# Altium PCB PCB1.PcbDoc
Units mm, origin at the board's own origin, x right, y up, seen from the top; angles counter-clockwise.
Board outline 100 x 50 mm, 2 copper layers (Top Layer, Bottom Layer); 30 components, 21 nets, 93 pads, 0 vias.
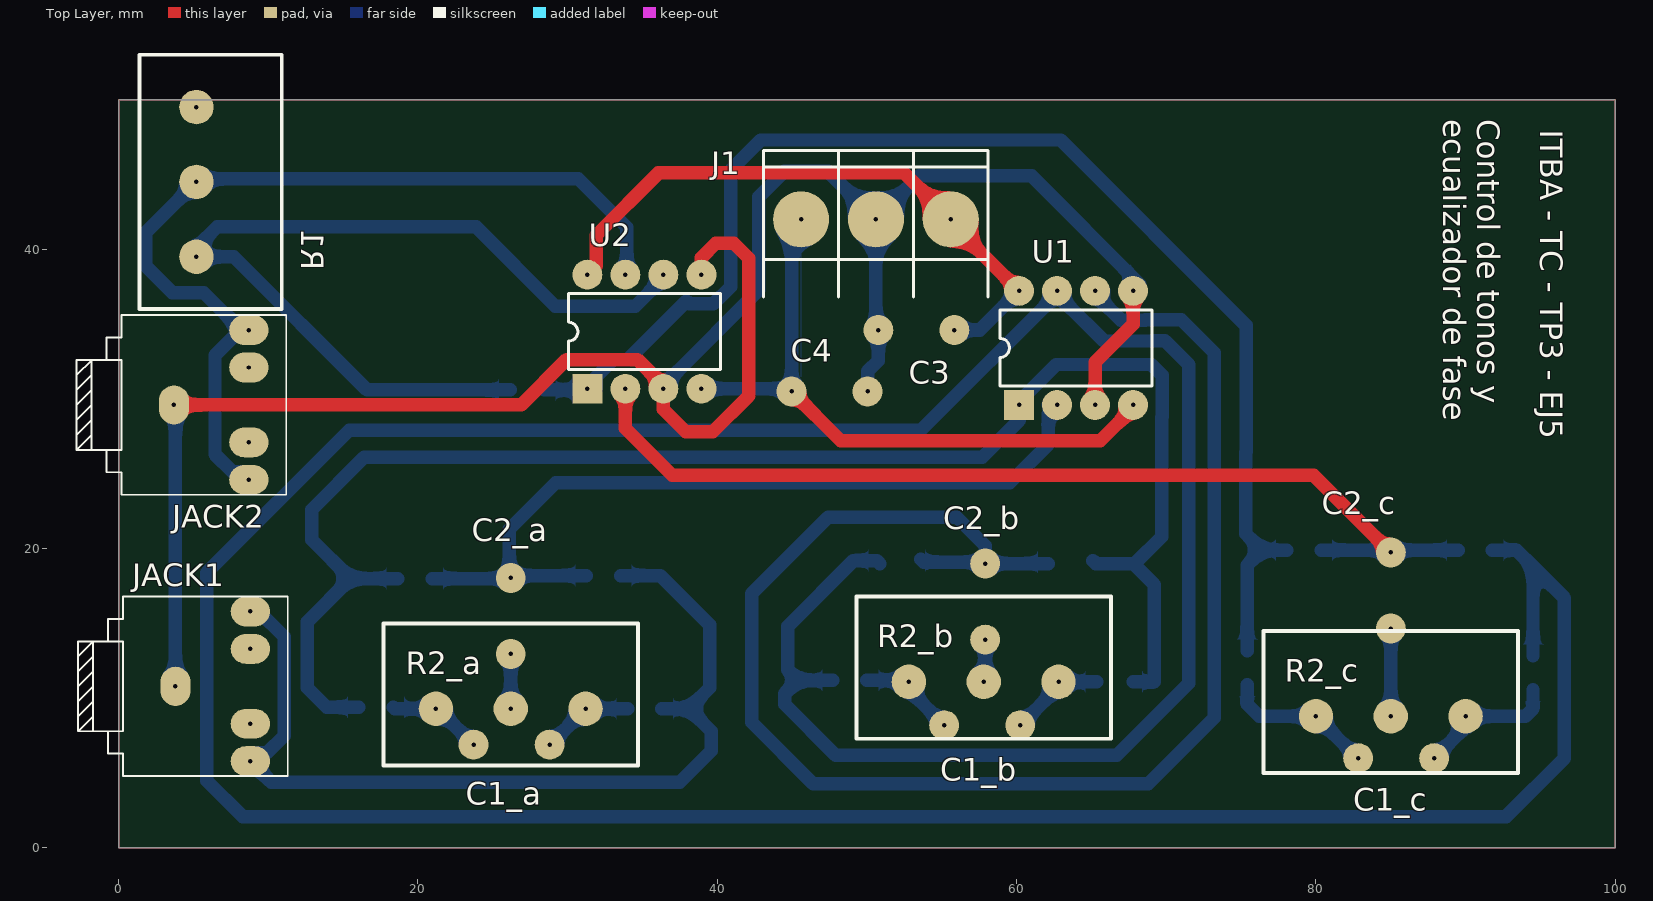
[diagram p0: Top Layer view]
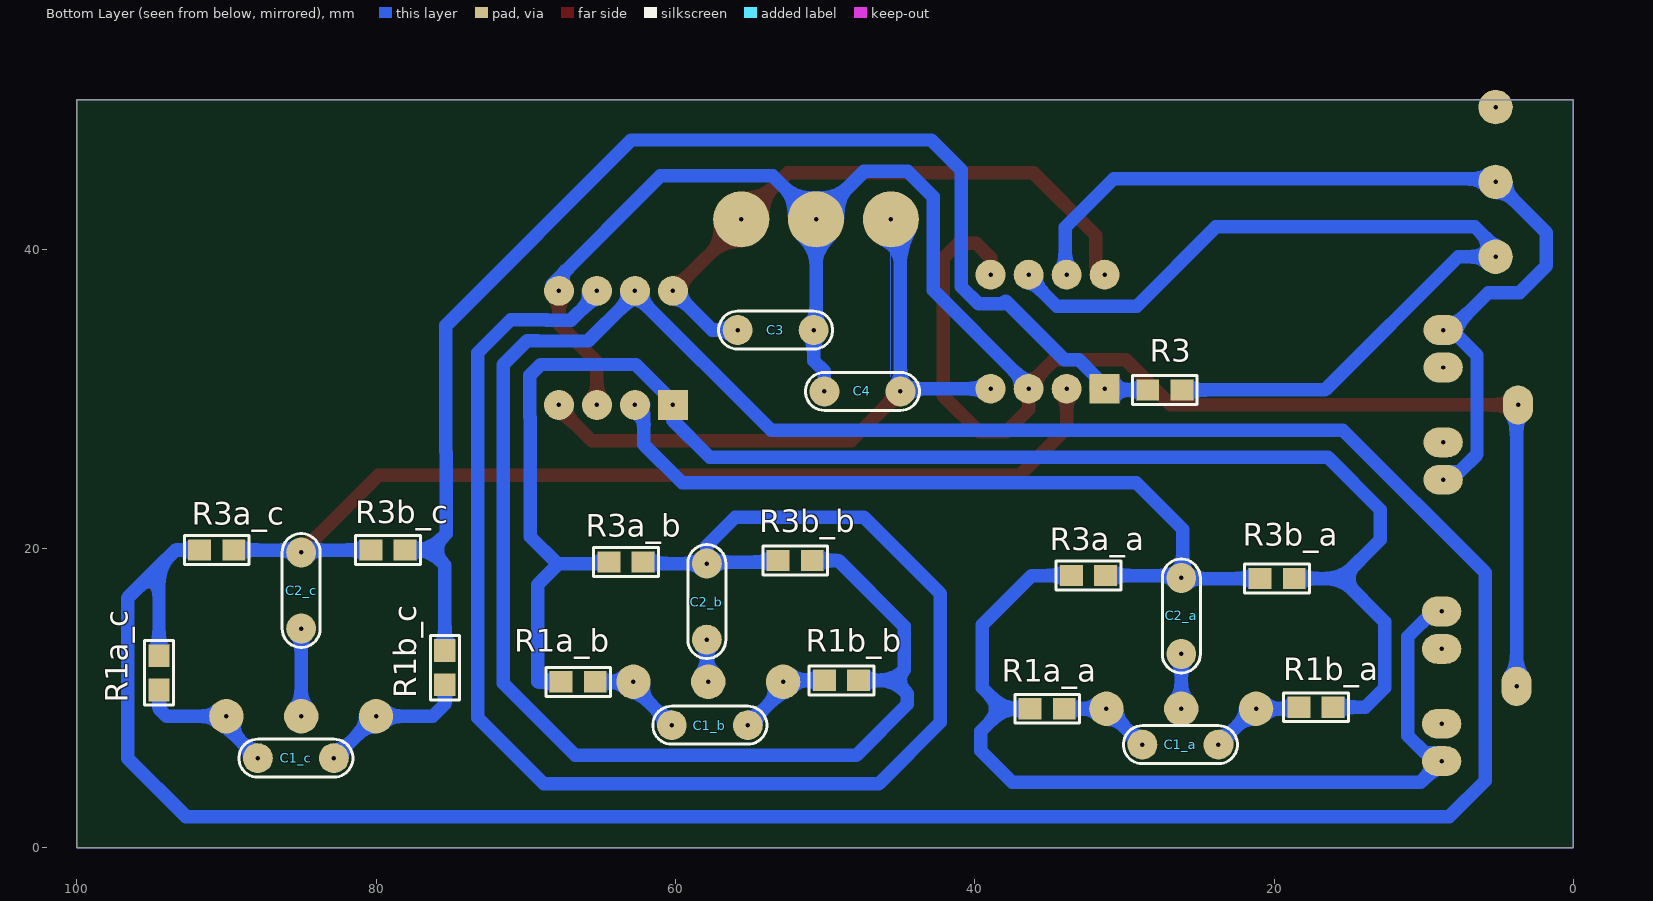
[diagram p1: Bottom Layer view, seen from below]
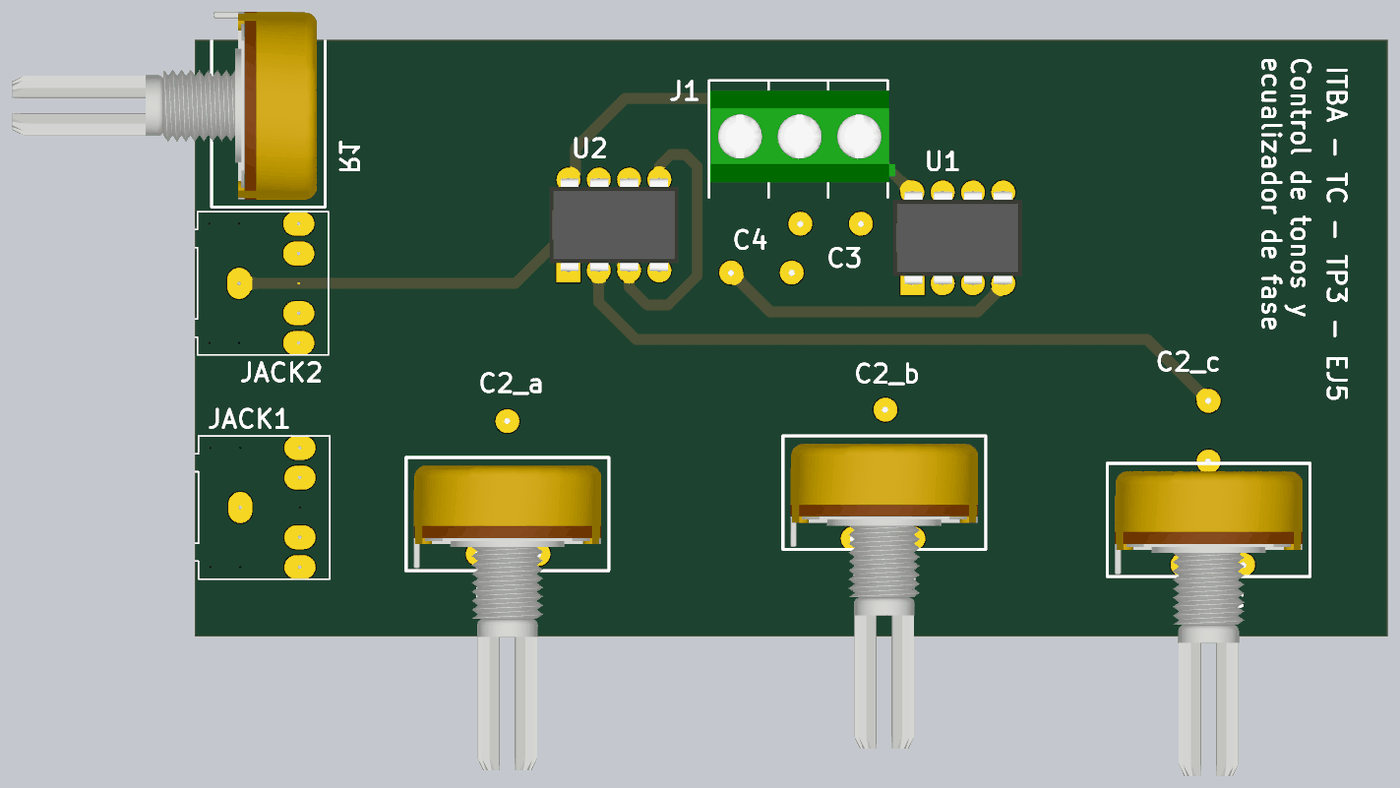
[diagram p2: 3D render of the assembled board from above, using the file's embedded part models]
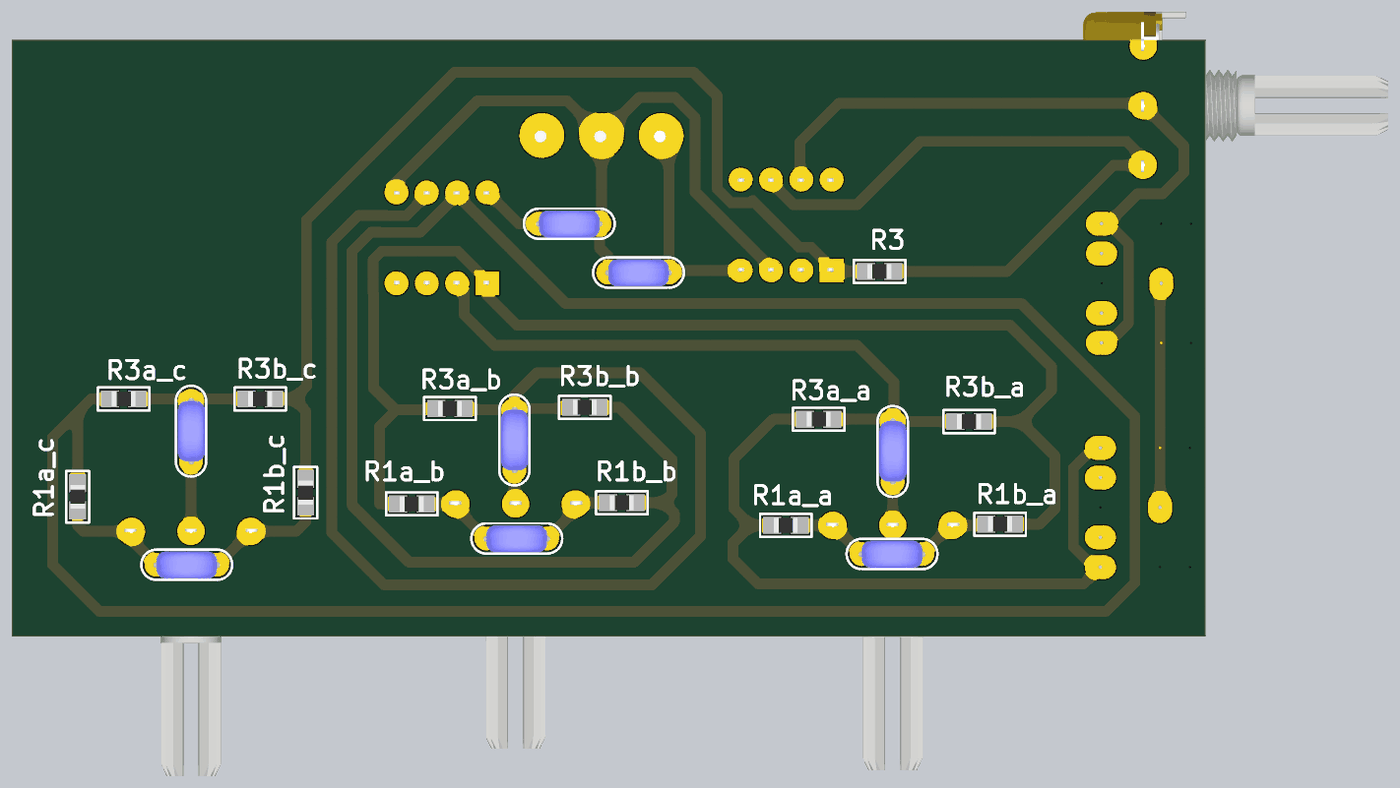
[diagram p3: 3D render of the assembled board from below, using the file's embedded part models]

## Layer stack, top to bottom
Top Solder: solder mask 0.0102, Solder Resist, Dk 3.5
Top Layer: signal copper 0.0356
Dielectric 1: dielectric 0.32, FR-4, Dk 4.8
Bottom Layer: signal copper 0.0356
Bottom Solder: solder mask 0.0102, Solder Resist, Dk 3.5

## Board outline
0,0 100,0 100,50 0,50

## Design rules (kind name [scope] priority, off if disabled: settings)
Clearance [All] p1: gap=0.5 ignorepadtopadclearanceinfootprint=FALSE
PolygonConnect PolygonConnect_5 [All vs IsNamedPolygon('GND_L02_P010')] p1: thpad.connectstyle=Relief thpad.reliefconductorwidth=0.5 thpad.reliefentries=4 thpad.polygonreliefangle="45 Angle" thpad.airgapwidth=0.254 smdpad.connectstyle=Relief smdpad.reliefconductorwidth=0.5 smdpad.reliefentries=4 smdpad.polygonreliefangle="45 Angle" smdpad.airgapwidth=0.254 via.connectstyle=Relief via.reliefconductorwidth=0.254 via.reliefentries=4 via.polygonreliefangle="90 Angle" via.airgapwidth=0.254
PolygonConnect Cond_width_mine [All vs IsNamedPolygon('GND_L02_P010')] p2: thpad.connectstyle=Relief thpad.reliefconductorwidth=0.5 thpad.reliefentries=4 thpad.polygonreliefangle="90 Angle" thpad.airgapwidth=0.254 smdpad.connectstyle=Relief smdpad.reliefconductorwidth=0.5 smdpad.reliefentries=4 smdpad.polygonreliefangle="90 Angle" smdpad.airgapwidth=0.254 via.connectstyle=Relief via.reliefconductorwidth=0.254 via.reliefentries=4 via.polygonreliefangle="90 Angle" via.airgapwidth=0.254
PolygonConnect PolygonConnect_4 [All vs IsNamedPolygon('GND_L02_P010')] p3: connectstyle=Relief reliefconductorwidth=0.5 reliefentries=4 polygonreliefangle="90 Angle" airgapwidth=0.254
PolygonConnect PolygonConnect_3 [All vs IsNamedPolygon('GND_L02_P010')] p4: thpad.connectstyle=Relief thpad.reliefconductorwidth=0.5 thpad.reliefentries=4 thpad.polygonreliefangle="90 Angle" thpad.airgapwidth=0.254 smdpad.connectstyle=Relief smdpad.reliefconductorwidth=0.254 smdpad.reliefentries=4 smdpad.polygonreliefangle="90 Angle" smdpad.airgapwidth=0.254 via.connectstyle=Relief via.reliefconductorwidth=0.254 via.reliefentries=4 via.polygonreliefangle="90 Angle" via.airgapwidth=0.254
PolygonConnect PolygonConnect_2 [All vs IsNamedPolygon('GND_L02_P010')] p5: thpad.connectstyle=Relief thpad.reliefconductorwidth=0.5 thpad.reliefentries=4 thpad.polygonreliefangle="90 Angle" thpad.airgapwidth=0.254 smdpad.connectstyle=Relief smdpad.reliefconductorwidth=0.5 smdpad.reliefentries=4 smdpad.polygonreliefangle="90 Angle" smdpad.airgapwidth=0.254 via.connectstyle=Relief via.reliefconductorwidth=0.254 via.reliefentries=4 via.polygonreliefangle="90 Angle" via.airgapwidth=0.254
PolygonConnect PolygonConnect_1 [All vs IsNamedPolygon('GND_L02_P010')] p6: thpad.connectstyle=Relief thpad.reliefconductorwidth=0.5 thpad.reliefentries=4 thpad.polygonreliefangle="90 Angle" thpad.airgapwidth=0.254 smdpad.connectstyle=Relief smdpad.reliefconductorwidth=0.254 smdpad.reliefentries=4 smdpad.polygonreliefangle="90 Angle" smdpad.airgapwidth=0.254 via.connectstyle=Relief via.reliefconductorwidth=0.254 via.reliefentries=4 via.polygonreliefangle="90 Angle" via.airgapwidth=0.254
PolygonConnect [All] p7: connectstyle=Relief reliefconductorwidth=0.254 reliefentries=4 polygonreliefangle="90 Angle" airgapwidth=0.254
RoutingVias [All] p1: holewidth=0.5 width=2 viastyle="Through Hole" minholewidth=0.3 minwidth=1.5 maxholewidth=0.5 maxwidth=2
SolderMaskExpansion [All] p1: expansion=0.102
Width [All] p1: maxlimit=0.9 minlimit=0.6 preferedwidth=0.9
30 further rules are at their usual default settings.

## Classes and differential pairs
component class U_EQ_C: C1_c C2_c R1a_c R1b_c R2_c R3a_c R3b_c U2
component class U_EQ_B: C1_b R1a_b R1b_b R2_b R3a_b R3b_b
component class U_EQ_A: C1_a C2_a R1a_a R1b_a R2_a R3a_a R3b_a U1
component class Top: C3 C4 JACK1 JACK2 R1 R3

## Components (designator, comment, footprint, x,y, rotation, side; value= is the part's Value field where it differs from the comment)
C1_a "47nF" CAP200 26.257,6.9 r180 bottom
C1_b "470nF" CAP200 57.7,8.2 r180 bottom
C1_c "56nF" CAP200 85.357,6 r180 bottom
C2_a "470nF" CAP200 26.2,15.5 r90 bottom
C2_b "47nF" CAP200 57.9,16.46 r90 bottom
C2_c "5.6nF" CAP200 85,17.2 r90 bottom
C3 "100nF" CAP200 53.3,34.6 r180 bottom
C4 "100nF" CAP200 47.5,30.5 r180 bottom
J1 "BORNERA 3" BORNERA3 50.6,42 r270 top
JACK1 "FC68131" *FC68131-5P 8.8,10.8 r0 top
JACK2 "FC68131" *FC68131-5P 8.7,29.6 r0 top
R1 "1K" POTENCIOMETRO 5.2,44.5 r90 top
R1a_a "120R" 0805 35.157,9.3 r180 bottom
R1a_b "120R" 0805 66.5,11.1 r180 bottom
R1a_c "150R" 0805 94.5,11.7 r270 bottom
R1b_a "120R" 0805 17.2,9.4 r180 bottom
R1b_b "120R" 0805 48.9,11.2 r180 bottom
R1b_c "150R" 0805 75.4,12.043 r90 bottom
R2_a "100K" POTENCIOMETRO 26.2,9.3 r0 top
R2_b "1K" POTENCIOMETRO 57.8,11.1 r0 top
R2_c "1K" POTENCIOMETRO 85,8.8 r0 top
R3 "470R" 0805 27.3,30.6 r180 bottom
R3a_a "1M" 0805 32.4,18.2 r180 bottom
R3a_b "10K" 0805 63.3,19.1 r180 bottom
R3a_c "10K" 0805 90.643,19.9 r180 bottom
R3b_a "1M" 0805 19.8,18 r180 bottom
R3b_b "10K" 0805 52,19.2 r180 bottom
R3b_c "10K" 0805 79.2,19.9 r180 bottom
U1 "LM833" DIP8 60.16,29.6 r90 top
U2 "LM833" DIP8 31.32,30.68 r90 top

## Footprints (in the part's own frame and the unit in brackets; to place one, negate y for a bottom-side part, rotate by r counter-clockwise, add the part's x,y. Pads: shape width x height; smd on the part's side, far side on the other; paste and mask are expansions set on the pad)
0805 [mil] "Pasivo 0805"
  rect 60x56 smd: 1(-45,0) 2(45,0)
  silkscreen extent -85,-38 85,38, body extent -40,-25 39,25, height 15
*FC68131-5P [mm]
  oval 2x2.616 hole 0.3: 1(-5,0)
  oval 2.616x2 hole 0.3: 2(0,-5) 3(0,-2.5) 4(0,2.5) 5(0,5)
  round 0 all layers, no hole: None(-7.5,-5) None(-7.5,5) None(-5,-5) None(-5,5) None(0,0)
  silkscreen extent -11.5,-6 2.5,6
BORNERA3 [mm] "Bornera con Tornillos 5mm separación"
  round 3.75 hole 0.3: 1(0,5) 2(0,0) 3(0,-5)
  silkscreen extent -4.6,-7.5 5.2,7.5, body extent -3.76,-7.39 3.94,8.11, height 10.05
CAP200 [mm]
  round 2 hole 0.3: 1(-2.54,0) 2(2.54,0)
  silkscreen extent -3.81,-1.27 3.81,1.27, body extent -2.79,-1.17 2.79,1.12, height 6.24
DIP8 [mm]
  rect 2x2 hole 0.3: 1(0,0)
  round 2 hole 0.3: 2(0,-2.54) 3(0,-5.08) 4(0,-7.62) 5(7.62,-7.62) 6(7.62,-5.08) 7(7.62,-2.54) 8(7.62,0)
  silkscreen extent 1.27,-8.89 6.35,1.27, body extent -0.06,-9.21 7.7,1.59, height 4.5
POTENCIOMETRO [mm]
  round 2.3 hole 0.3: 1(-5,0) 2(0,0) 3(5,0)
  silkscreen extent -8.5,-5.7 8.5,3.8, body extent -7.87,-5.03 7.87,20.53, height 20.14

## Part data
C1_a C1_b C1_c C2_a C2_b C2_c C3 C4: library part CAP
JACK1 JACK2: "Stereo Jack, 3.5mm, 3pos, Pcb", Package=None, Availability=Unavailable, MF=Cliff, MP=FC68131, Price=None, SnapEDA_Link=https://www.snapeda.com/parts/FC68131/Cliff%20Electronics/view-part/?ref=snap
R1 R2_a R2_b R2_c: library part POTENCIOMETRO
R1a_a R1a_b R1a_c R1b_a R1b_b R1b_c R3 R3a_a R3a_b R3a_c R3b_a R3b_b R3b_c: library part RES
U1 U2: "Dual Audio Operational Amplifier"

## Nets (pads, with @x,y where several pads share a name; then routed paths per layer and width w, separated by ;. In a path a pad name is that pad's centre, name@x,y a point inside that pad or via, vN(x,y) a via of type N, cw(c..) or ccw(c..) an arc to the next point about the centre after c; other vN are vias at no path point)
+Vcc: C3.1 J1.1 U1.8 U2.8 | length 41.7
  Top Layer w0.9: U2.8 31.91,38.89 31.91,40.941 36.069,45.1 52.5,45.1 J1.1 55.6,41.78 U1.8
  Bottom Layer w0.9: C3.1 57.54,34.6 U1.8
-Vcc: C4.2 J1.3 U1.4 U2.4 | length 53.7
  Top Layer w0.9: C4.2 48.26,27.2 65.598,27.2 67.78,29.382 U1.4
  Bottom Layer w0: 45.6,31.48 J1.3
  Bottom Layer w0.9: U2.4 44.78,30.68 C4.2 44.96,41.36 J1.3
Aud_in: JACK1.2 JACK1.5 R1a_a.1 R3a_a.1 | length 63.8
  Bottom Layer w0.9: JACK1.5 9.366,15.8 11.058,14.108 11.058,7.492 9.916,6.35 8.8,6.35 JACK1.2 10.2,4.4 37.5,4.4 39.6,6.5 39.6,7.8 38.1,9.3 ; R3a_a.1 36.2,18.2 39.5,14.9 39.5,10.7 38.1,9.3 ; R1a_a.1 38.1,9.3
Aud_out: JACK2.2 JACK2.5 R1.2 U2.7 | length 61.1
  Bottom Layer w0.9: JACK2.2 8.15,25.15 7.584,25.15 6.442,26.292 6.442,32.908 8.134,34.6 JACK2.5@8.2,34.6 ; JACK2.5 JACK2.5@8.2,34.6 ; U2.7@33.96,38.3 33.96,41.46 30.72,44.7 5.4,44.7 R1.2 1.8,41.1 1.8,38.9 3.6,37.1 5.7,37.1 JACK2.5@8.2,34.6
GND: C3.2 C4.1 J1.2 JACK1.1 JACK2.1 U1.3 U1.5 U2.3 U2.5 | length 145.1
  Top Layer w0.9: JACK2.1 26.896,29.6 29.926,32.63 34.668,32.63 36.4,30.898 U2.3 36.4,29.3 37.9,27.8 39.7,27.8 42.1,30.2 42.1,39.4 41.1,40.4 39.9,40.4 38.94,39.44 U2.5 ; U1.3 65.24,32.44 67.78,34.98 U1.5
  Bottom Layer w0.9: JACK2.1 3.8,29.5 JACK1.1 ; U2.3 36.99,31.27 36.99,31.488 42.775,37.273 42.775,43.495 44.48,45.2 47.4,45.2 J1.2 ; C4.1 50.04,31.84 50.76,32.56 C3.2 50.6,34.76 J1.2 ; U1.5 68.23,37.67 61,44.9 53.5,44.9 J1.2
NetC1_a_1: C1_a.1 R1a_a.2 R2_a.3 | length 6.2
  Bottom Layer w0.9: C1_a.1 31.197,9.3 R2_a.3 R1a_a.2
NetC1_a_2: C1_a.2 R1b_a.1 R2_a.1 | length 6.4
  Bottom Layer w0.9: R1b_a.1 18.443,9.3 R2_a.1 21.317,9.3 C1_a.2
NetC1_b_1: C1_b.1 R1a_b.2 R2_b.3 | length 6.4
  Bottom Layer w0.9: C1_b.1 62.8,10.76 R2_b.3 ; R2_b.3@62.9,11.1 R1a_b.2
NetC1_b_2: C1_b.2 R1b_b.1 R2_b.1 | length 6.7
  Bottom Layer w0.9: R1b_b.1@50,11.2 R1b_b.1 52.7,11.2 R2_b.1 52.8,10.56 C1_b.2
NetC1_c_1: C1_c.1 R1a_c.2 R2_c.3 | length 9.6
  Bottom Layer w0.9: C1_c.1 90,8.103 R2_c.3 94,8.8 94.5,9.3 R1a_c.2
NetC1_c_2: C1_c.2 R1b_c.1 R2_c.1 | length 10.2
  Bottom Layer w0.9: R1b_c.1 75.4,9.6 76.2,8.8 R2_c.1 82.8,6 C1_c.2
NetC2_a_1: C2_a.1 R2_a.2 | length 3.7
  Bottom Layer w0.9: R2_a.2 C2_a.1
NetC2_a_2: C2_a.2 R3a_a.2 R3b_a.1 U1.2 | length 55.4
  Bottom Layer w0.9: R3b_a.1 26.16,18 C2_a.2 26.36,18.2 R3a_a.2 ; C2_a.2@26.1,18.1 26.1,21.3 29.2,24.4 59.551,24.4 62.11,26.959 62.11,29.01 U1.2 U1.2@62.11,29.6
NetC2_b_1: C2_b.1 R2_b.2 | length 2.9
  Bottom Layer w0.9: R2_b.2 57.9,11.2 C2_b.1
NetC2_b_2: C2_b.2 R3a_b.2 R3b_b.1 U1.6 | length 105.9
  Bottom Layer w0.9: R3b_b.1@53.6,19.3 53.8,19.1 57.8,19.1 C2_b.2 ; R3a_b.2@62.114,19 C2_b.2 ; U1.6 65.83,37.22 65.83,36.412 66.972,35.27 68.588,35.27 68.609,35.291 70.989,35.291 73.2,33.08 73.2,8.7 68.8,4.3 46.4,4.3 42.3,8.4 42.3,17 47.4,22.1 56,22.1 57.9,20.2 C2_b.2
NetC2_c_1: C2_c.1 R2_c.2 | length 5.9
  Bottom Layer w0.9: R2_c.2 C2_c.1
NetC2_c_2: C2_c.2 R3a_c.2 R3b_c.1 U2.2 | length 66.4
  Top Layer w0.9: U2.2 33.86,28.04 37,24.9 79.84,24.9 C2_c.2
  Bottom Layer w0.9: R3b_c.1 R3a_c.2
NetR1_1: R1.1 R3.2 U2.6 | length 60.6
  Bottom Layer w0.9: R1.1@4.8,39.5 R1.1 ; R3.2 16.6,30.6 7.7,39.5 R1.1 ; U2.6 36.4,38.082 34.518,36.2 29.182,36.2 23.882,41.5 6.6,41.5 5.2,40.1 R1.1
NetR1a_b_1: R1a_b.1 R1b_a.2 R3a_b.1 R3b_a.2 U1.1 | length 109.2
  Bottom Layer w0.9: R1b_a.2 13.9,9.4 12.6,10.7 12.6,15.1 15.5,18 ; R3b_a.2 15.5,18 ; R3a_b.1@65.1,19.2 65.3,19 67.8,19 69.2,17.6 69.2,11.1 R1a_b.1@67.786,11.1 ; 67.9,19 69.7,20.8 69.7,28.762 69.73,28.792 69.73,31.57 69,32.3 62.642,32.3 60.16,29.818 U1.1 60.16,28.56 57.7,26.1 16.4,26.1 12.9,22.6 12.9,20.6 15.5,18
NetR1a_c_1: R1a_c.1 R1b_b.2 R3a_c.1 R3b_b.2 U1.7 | length 272.6
  Bottom Layer w0.9: R1b_b.2@47.714,11.2 45.4,11.2 ; R3b_b.2@50.857,19 50.657,19.2 49.1,19.2 44.7,14.8 44.7,11.9 45.4,11.2 ; U1.7 62.7,37.002 53.598,27.9 15.4,27.9 5.9,18.4 5.9,4.5 8.3,2.1 92.7,2.1 96.6,6 96.6,16.7 94.5,18.8 ; 63.29,36.412 65.832,33.87 69.168,33.87 69.189,33.891 69.909,33.891 71.5,32.3 71.5,11 66.7,6.2 47.9,6.2 44.5,9.6 44.5,10.3 45.4,11.2 ; R3a_c.1 93.4,19.9 94.5,18.8 ; R1a_c.1 94.5,18.8
NetR1b_c_2: R1b_c.2 R3.1 R3b_c.2 U2.1 | length 88.4
  Bottom Layer w0.9: R3.1 31.24,30.6 U2.1 31.91,30.68 31.91,31.488 33.052,32.63 34.03,32.63 37.941,36.541 38.132,36.35 39.748,36.35 40.89,37.492 40.89,45.29 42.9,47.3 62.94,47.3 75.33,34.91 75.33,26.473 75.3,26.443 75.3,21 76.4,19.9 ; R1b_c.2 75.4,18.9 76.4,19.9 ; R3b_c.2 76.4,19.9
pads on no net: JACK1.3 JACK1.4 JACK1.None JACK2.3 JACK2.4 JACK2.None R1.3

## Other copper
Multi-Layer:
  the board outline again, w0.1

## Silkscreen, mask and mechanical layers (free items; w line width, h text height)
Top Overlay:
  text "Control de tonos y  / ecualizador de fase" at 88.5,48.7 h1.52 r270
  text "ITBA - TC - TP3 - EJ5" at 95,48 h1.52 r270